# EAGLE board Nusbio1.0.WaveShare.WithLed.SeedStudio (EAGLE 7.6.0)
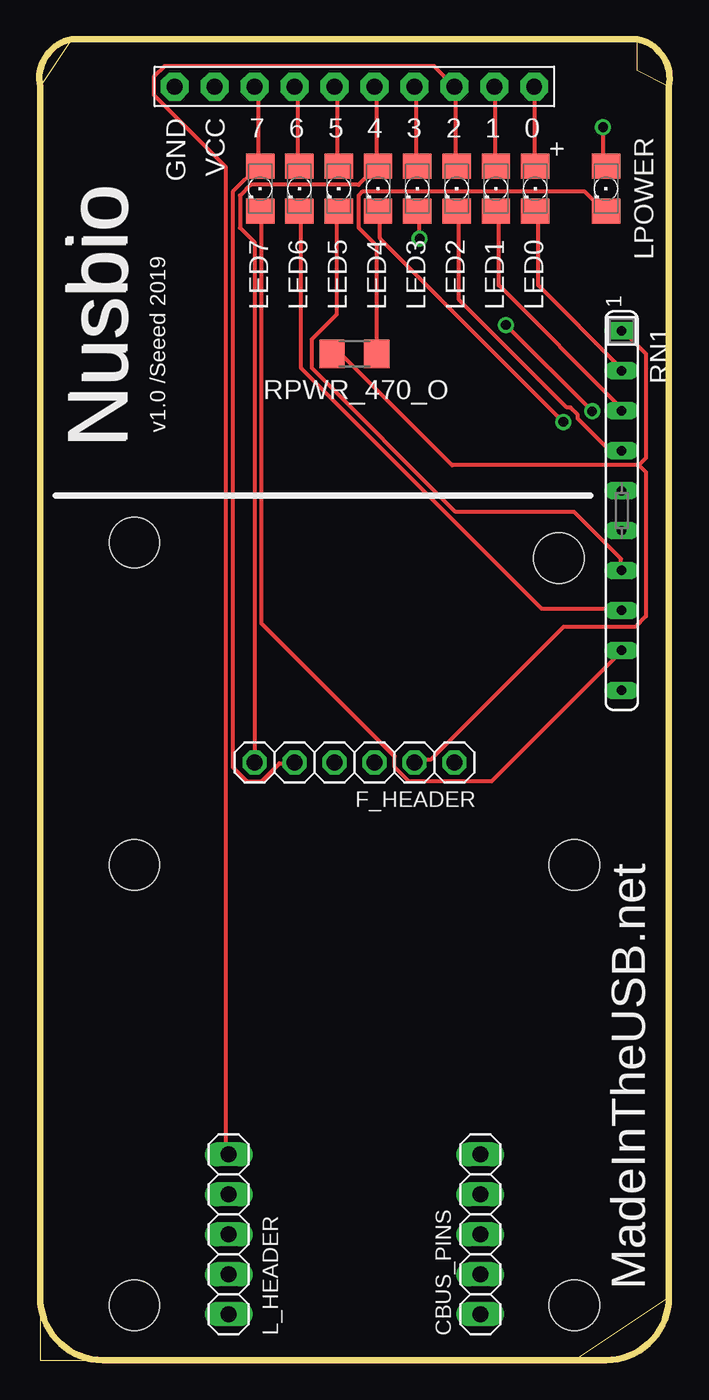
[diagram p0: board, top side]
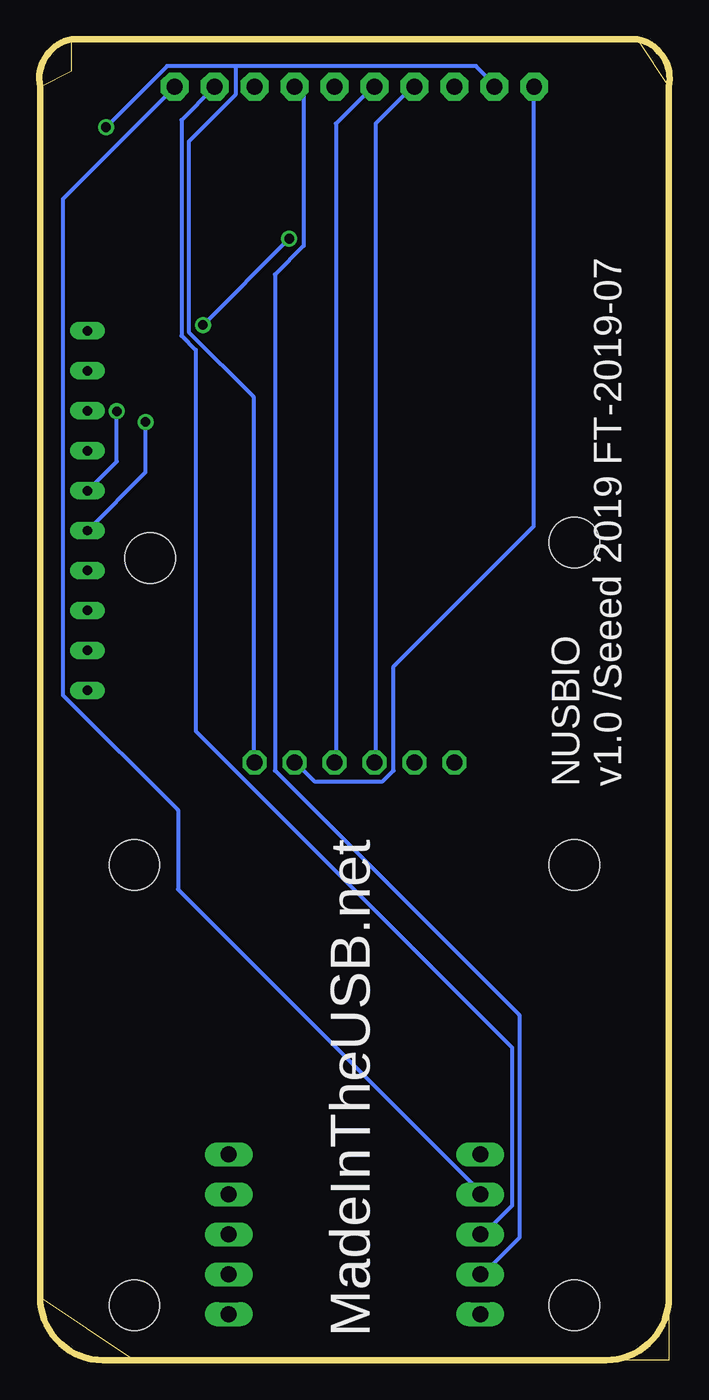
[diagram p1: board, bottom side, seen from below]

Size 40.1 x 84 mm. Coordinates in mm from the lower left corner, seen from the top.
Outline: 4.05,0 0.05,0 0.05,4
Outline: 29.05,0 34.05,0 40.05,4
Outline: 40.05,81 38.05,82 38.05,84
Outline: 2.05,84 0.05,81
Outline: 0.05,81 arc-90 2.05,84
Outline: 2.05,84 38.05,84
Outline: 38.05,84 arc-90 40.05,81
Outline: 40.05,81 40.05,4
Outline: 40.05,4 arc-90 36.05,0 29.05,0
Outline: 29.05,0 4.05,0
Outline: 4.05,0 arc-90 0.05,4
Outline: 0.05,4 0.05,81
Copper layers (1*16): Top 0.035mm / dielectric 1.5mm / Bottom 0.035mm
Design rules "default": minimum track width 10mil, minimum drill 24mil, track to track 8mil, track to pad 8mil, pad to pad 8mil, via to via 8mil, smd to smd 8mil, copper to edge 40mil, drill to drill 8mil, minimum pad ring 10mil, minimum via ring 8mil, stop-mask expansion 4mil, vias tented up to drill 0mil, thermal gap 10mil
Holes 3.2 mm at 6.05,3.5 34.05,3.5 6.05,31.5 34.05,31.5 33.05,51 6.05,52

## Footprints (pad centres in the part's own frame; a part is rotated, then mirrored left to right if it is on the bottom)
1X05 = drill 1.016 long: 1 -5.08,0; 2 -2.54,0; 3 0,0; 4 2.54,0; 5 5.08,0
1X06 = drill 1.016 octagon: 1 -6.35,0; 2 -3.81,0; 3 -1.27,0; 4 1.27,0; 5 3.81,0; 6 6.35,0
1206 = smd 1.6 x 1.803: A -1.422,0; C 1.422,0
SIP10 = drill 0.6 long: 1 -11.46,0; 2 -8.92,0; 3 -6.38,0; 4 -3.84,0; 5 -1.3,0; 6 1.24,0; 7 3.78,0; 8 6.32,0; 9 8.86,0; 10 11.4,0
R1206 = smd 1.6 x 1.803: 1 -1.422,0; 2 1.422,0
1X10-BIG = drill 1.016 pad 1.778 octagon: 1 -11.43,0; 2 -8.89,0; 3 -6.35,0; 4 -3.81,0; 5 -1.27,0; 6 1.27,0; 7 3.81,0; 8 6.35,0; 9 8.89,0; 10 11.43,0

## Placement (x,y rotation side)
CBUS_PINS  [1X05]  28.05,8 90 top
F_HEADER  [1X06]  20.05,38 180 top
L_HEADER  [1X05]  12.05,8 90 top
LED0  [1206]  31.55,74.5 270 top
LED1  [1206]  29.05,74.5 270 top
LED2  [1206]  26.55,74.5 270 top
LED3  [1206]  24.05,74.5 270 top
LED4  [1206]  21.55,74.5 270 top
LED5  [1206]  19.05,74.5 270 top
LED6  [1206]  16.55,74.5 270 top
LED7  [1206]  14.05,74.5 270 top
LPOWER  [1206]  36.05,74.5 270 top
RN1  [SIP10]  37.05,54 270 top
RPWR_470_O  [R1206]  20.05,64 180 top
U$1  PINHD-1X10  [1X10-BIG]  20.05,81 180 top

## Library data of the parts
CBUS_PINS L_HEADER = pinhead
F_HEADER LED0 LED1-LED7 LPOWER RPWR_470_O U$1 = adafruit
RN1 = resistor-sip

## Nets
CTS_G4: F_HEADER.6 LED4.A U$1.5
DCD_G3: L_HEADER.2 LED3.A U$1.4
DSR_G1: L_HEADER.3 LED1.A U$1.2
DTR_G2: L_HEADER.5 LED2.A U$1.3
GND: F_HEADER.2 RN1.1 RPWR_470_O.2 U$1.10
N$1: LED1.C RN1.3
N$2: LED0.C RN1.2
N$3: LED2.C RN1.4
N$4: LED3.C RN1.5
N$5: LED4.C RN1.6
N$6: LED7.C RN1.9
N$7: LED5.C RN1.7
N$8: LED6.C RN1.8
N$9: LPOWER.C RPWR_470_O.1
NUSBIO_VCC: F_HEADER.1 LPOWER.A U$1.9
RESET: L_HEADER.1
RI_G0: L_HEADER.4 LED0.A U$1.1
RTS_G7: F_HEADER.5 LED7.A U$1.8
RX_G6: F_HEADER.4 LED6.A U$1.7
TX_G5: F_HEADER.3 LED5.A U$1.6

## Tracks (layer width: path | path; a pad name or v marks a point on that pad's centre or on a via)
CTS_G4
  Top 0.254: U$1.5 21.45,80.92 21.45,76.12 LED4.A 21.45,75.89 20.31,74.75 13.45,74.75 12.77,74.07 12.77,72.01 13.68,71.09 13.68,38.18 F_HEADER.6
DCD_G3
  Top 0.254: LED3.A 23.97,76.12 23.97,80.92 U$1.4
  Bottom 0.254: L_HEADER.2 11.85,5.49 9.57,7.77 9.57,21.95 25.11,37.49 25.11,69.04 23.28,70.87 23.28,80.47 23.74,80.92 U$1.4
DSR_G1
  Top 0.254: LED1.A 29,76.12 29,80.92 U$1.2
  Bottom 0.254: L_HEADER.3 11.85,8 10.02,9.83 10.02,19.89 30.14,40.01 30.14,64.24 31.05,65.15 31.05,78.87 29,80.92 U$1.2
DTR_G2
  Top 0.254: LED2.A 26.48,76.12 26.48,80.92 U$1.3 26.25,81.15 25.11,82.3 7.96,82.3 7.28,81.61 7.28,80.47 11.85,75.89 11.85,13.26 L_HEADER.5
GND
  Top 0.254: 38.14,56.92 26.25,56.92 19.39,63.78 18.71,63.78 RPWR_470_O.2 | 38.14,56.92 38.6,57.38 38.6,64.01 37.23,65.38 RN1.1 | 38.14,56.92 38.6,56.46 38.6,47.32 37.91,46.63 33.34,46.63 24.88,38.18 23.97,38.18 F_HEADER.2
  Bottom 0.254: U$1.10 8.65,80.92 8.65,53.03 17.57,44.12 17.57,37.49 18.25,36.8 22.6,36.8 23.74,37.95 F_HEADER.2
N$1
  Top 0.254: LED1.C 29.22,72.92 29.22,68.35 37,60.58 RN1.3
N$2
  Top 0.254: LED0.C 31.74,72.92 31.74,68.35 37,63.09 RN1.2
N$3
  Top 0.254: LED2.C 26.71,72.92 26.71,67.44 33.57,60.58 33.8,60.58 34.25,60.12 34.25,59.89 36.08,58.06 37,58.06 RN1.4
N$4  (via drill 0.61)
  Top 0.254: v24.2,71.32 24.2,72.92 LED3.C | v35.17,60.35 v29.68,65.84
  Bottom 0.254: v29.68,65.84 v24.2,71.32 | v35.17,60.35 35.17,57.15 37,55.32 RN1.5
N$5  (via drill 0.61)
  Top 0.254: v33.34,59.66 21.68,71.32 21.68,72.92 LED4.C
  Bottom 0.254: v33.34,59.66 33.34,56.46 37,52.81 RN1.6
N$6
  Top 0.254: LED7.C 14.14,72.92 14.14,46.86 22.6,38.41 22.6,37.72 23.51,36.8 28.77,36.8 37,45.03 RN1.9
N$7
  Top 0.254: LED5.C 18.94,72.92 18.94,66.52 17.34,64.92 17.34,63.09 26.48,53.95 34.03,53.95 37,50.98 37,50.29 RN1.7
N$8
  Top 0.254: LED6.C 16.65,72.92 16.65,63.09 31.97,47.78 37,47.78 RN1.8
N$9
  Top 0.254: RPWR_470_O.1 21.45,64.01 21.45,70.87 20.31,72.01 20.31,74.07 20.54,74.3 34.71,74.3 35.85,73.15 LPOWER.C
NUSBIO_VCC  (via drill 0.61)
  Top 0.254: v35.85,78.41 35.85,76.12 LPOWER.A
  Bottom 0.254: v35.85,78.41 31.97,82.3 27.62,82.3 | 27.62,82.3 12.31,82.3 11.17,81.15 U$1.9 | 27.62,82.3 27.62,80.47 30.6,77.5 30.6,65.38 26.48,61.27 26.48,38.18 F_HEADER.1
RI_G0
  Top 0.254: LED0.A 31.51,76.12 31.51,80.92 U$1.1
  Bottom 0.254: L_HEADER.4 12.08,10.74 31.28,29.95 31.28,34.98 38.6,42.29 38.6,73.84 31.51,80.92 U$1.1
RTS_G7
  Top 0.254: U$1.8 13.91,80.92 13.91,76.12 LED7.A 13.91,75.89 12.31,74.3 12.31,37.72 13.22,36.8 14.14,36.8 15.28,37.95 16.19,37.95 F_HEADER.5
RX_G6
  Top 0.254: LED6.A 16.42,76.12 16.42,80.92 U$1.7
  Bottom 0.254: F_HEADER.4 18.71,38.18 18.71,78.64 16.42,80.92 U$1.7
TX_G5
  Top 0.254: LED5.A 18.94,76.12 18.94,80.92 U$1.6
  Bottom 0.254: F_HEADER.3 21.22,38.18 21.22,78.64 18.94,80.92 U$1.6

## Text on the board
tNames: GND | VCC | 7 | 6 | 5 | 4 | 3 | 2 | 1 | 0 | + | v1.0 /Seeed 2019 | Nusbio | Nusbio | MadeInTheUSB.net
bNames: NUSBIO / v1.0 /Seeed 2019 FT-2019-07 | MadeInTheUSB.net